# Altium PCB current_sensor_power_pcb.PcbDoc
Units mil, origin at the board's own origin, x right, y up, seen from the top; angles counter-clockwise.
Board outline 2354 x 1348.5 mil, 2 copper layers (Top Layer, Bottom Layer); 16 components, 8 nets, 48 pads, 14 vias.
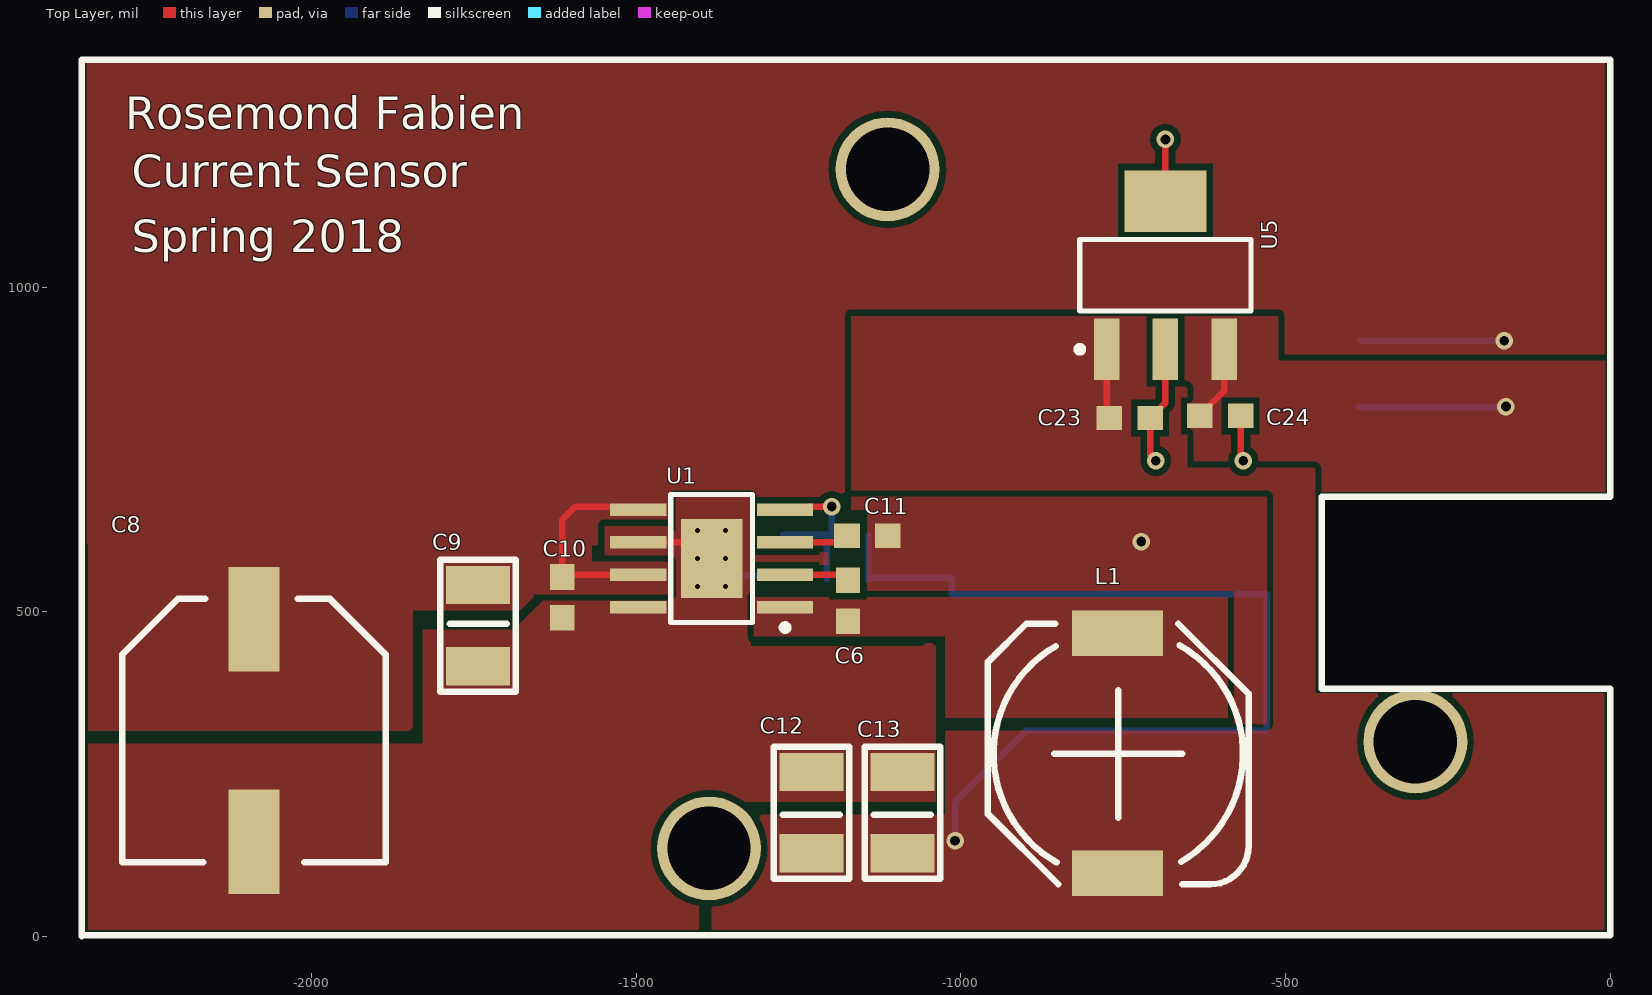
[diagram p0: Top Layer view]
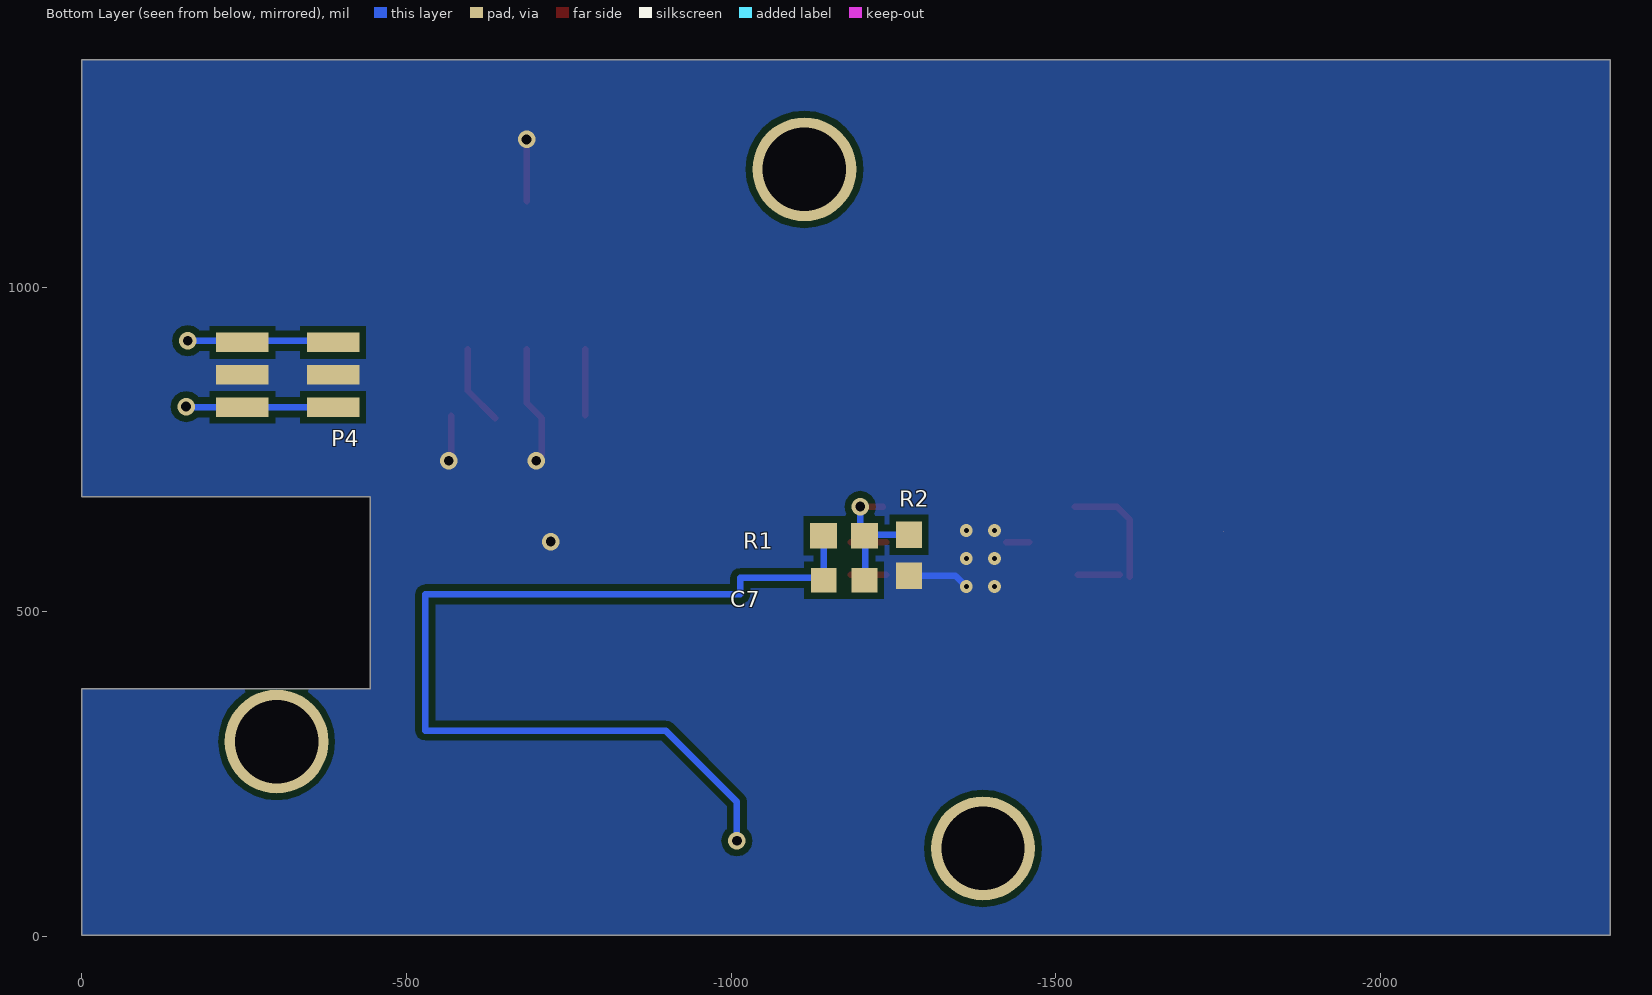
[diagram p1: Bottom Layer view, seen from below]

## Layer stack, top to bottom
Top Solder: solder mask 0.4, Solder Resist, Dk 3.5
Top Layer: signal copper 1.4
Dielectric 1: dielectric 12.6, FR-4, Dk 4.8
Bottom Layer: signal copper 1.4
Bottom Solder: solder mask 0.4, Solder Resist, Dk 3.5

## Board outline
-2354,1.5 -2354,1350 0,1350 0,677 -444,677 -444,381 0,381 0,1.5
cut-out: -1758.5,623.5

## Design rules (kind name [scope] priority, off if disabled: settings)
Clearance [All] p1: gap=10 ignorepadtopadclearanceinfootprint=FALSE except(0: Arc-Hole Track-Hole SMDPad-Hole THPad-Hole Via-Hole Fill-Hole Poly-Hole Region-Hole Text-Hole; 5: Track-Track Track-SMDPad SMDPad-SMDPad; 7: Track-Via)
HoleSize [All] p1: absolutevalues=TRUE maxlimit=150 minlimit=7 maxpercent=80.000 minpercent=20.000
MinimumAnnularRing [All] p1: minimumring=6
MinimumSolderMaskSliver [All] p1: minsoldermaskwidth=1
PolygonConnect [All] p1: connectstyle=Direct reliefconductorwidth=10 reliefentries=4 polygonreliefangle="90 Angle" airgapwidth=10
RoutingVias [All] p1: holewidth=10 width=22 viastyle="Through Hole" minholewidth=10 minwidth=22 maxholewidth=100 maxwidth=150
SilkToSolderMaskClearance [IsPad] p1: minsilkscreentomaskgap=5 clearancetoexposedcopper=TRUE
SolderMaskExpansion [All] p1: expansion=4
Width [All] p1: maxlimit=150 minlimit=8 preferedwidth=10
27 further rules are at their usual default settings.

## Components (designator, comment, footprint, x,y, rotation, side; value= is the part's Value field where it differs from the comment)
C6 "Cap" CAPC0603 -1174,517 r270 top value=470nF
C7 "Cap" CAPC0603 -1174,548.5 r180 bottom value=75pF
C8 "EEHZA1H101P" EEHZA1H101P -2089,317 r0 top value=100uF
C9 "Cap" CAP1210 -1744,542 r90 top value=10uF
C10 "Cap" CAPC0603 -1614,522 r270 top value=100nF
C11 "Cap" CAPC0603 -1144,617 r0 top value=10uF
C12 "Cap" CAP1210 -1230,127 r270 top value=47uF
C13 "Cap" CAP1210 -1090,127 r270 top value=47uF
C23 "Cap" CAPC0603 -740,798.33 r0 top value=1uF
C24 "Cap" CAPC0603 -600.55,801.65 r0 top value=50uF
L1 "MSS1048-563MLB" MSS1048-563MLB -759,282 r0 top value=56uH
P4 "Amphenol 20021121-00006C4LF" "Amphenol FCI 20021121-00006C4LF" -317,865 r180 bottom
R1 "Res" RES0603 -1174,617 r180 bottom value=40.2k
R2 "Res" RES0603 -1274,587 r270 bottom value=10k
U1 "LMR23610ADDAR" LMR23610ADDAR -1384,582 r180 top
U5 "3.3V LDO Reg" SOT23-4n -685,1018.33 r90 top

## Footprints (in the part's own frame and the unit in brackets; to place one, negate y for a bottom-side part, rotate by r counter-clockwise, add the part's x,y. Pads: shape width x height; smd on the part's side, far side on the other; paste and mask are expansions set on the pad)
"Amphenol FCI 20021121-00006C4LF" [mm] "6 Positions Header Connector"
  rect 2.05x0.76 smd: 1(-1.775,1.27) 2(-1.775,0) 3(-1.775,-1.27) 4(1.775,1.27) 5(1.775,0) 6(1.775,-1.27)
  body extent -2.75,-1.9 2.75,1.91, height 4.51
CAP1210 [mm]
  rect 1.5x2.5 smd: 1(-0.02,0) 2(-3.2,0)
  silkscreen extent -4.2,-1.48 0.97,1.48, body extent -3.22,-1.25 0,1.26, height 2.5
CAPC0603 [mm] "Chip Capacitor, 2-Leads, Body 1.60x0.80mm, IPC Medium Density"
  rect 1x0.95 smd: 1(-0.8,0) 2(0.8,0)
  body extent -0.88,-0.48 0.87,0.48, height 0.8
EEHZA1H101P [mm] "CAP ALUM POLY HYB 100UF 50V SMD"
  rect 2x4.1 smd: 1(0,4.35) 2(0,-4.35)
  silkscreen extent -5.15,-5.15 5.15,5.15, body extent -5.24,-5.99 5.25,5.99, height 10.54
LMR23610ADDAR [mm] "IC REG BUCK ADJ 1A SYNC 8SOPWRPD"
  rect 2.2x0.5 smd: 1(-2.875,1.905) 2(-2.875,0.635) 3(-2.875,-0.635) 4(-2.875,-1.905) 5(2.875,-1.905) 6(2.875,-0.635) 7(2.875,0.635) 8(2.875,1.905)
  rect 2.4x3.1 smd: 9(0,0)
  silkscreen extent -3,-2.5 1.6,2.83, body extent -2,-2.5 2,2.5, height 1.7
MSS1048-563MLB [mm] "FIXED IND 56UH 1.7A 126 MOHM"
  rect 3.56x1.78 smd: 1(0,4.7) 2(0,-4.7)
  silkscreen extent -5.06,-5.13 5.14,5.07, body extent -5.1,-5.15 5.1,5.15, height 5
RES0603 [mm] "Chip Resistor, 2-Leads, Body 1.60x0.80mm, IPC Medium Density"
  rect 1.05x1 smd: 1(-0.8,0) 2(0.8,0)
  body extent -0.88,-0.48 0.87,0.47, height 0.8
SOT23-4n [mm] "SOT223, 4-Leads, Body 6.50x7.00mm (avg), Pitch 2.30mm, IPC Medium Density"
  rect 2.4x1 smd: 1(-2.9,2.3) 2(-2.9,0) 3(-2.9,-2.3)
  rect 2.4x3.2 smd: 4(2.9,0)
  silkscreen extent -3.02,-3.35 1.4,3.47, body extent -1.85,-3.35 1.85,3.35, height 1.7

## Part data
C6: Supplier Part Number 1=399-7934-2-ND, Supplier 1=Digi-Key
C7: Supplier Part Number 1=399-15423-2-ND, Supplier 1=Digi-Key
C8: "CAP ALUM POLY HYB 100UF 50V SMD", Manufacturer 1=Panasonic, Supplier Part Number 1=P15442CT-ND, Tolerance=20%, Voltage=50V, ComponentLink1Description="Web Site", ComponentLink1URL=https://na.industrial.panasonic.com/products/capacitors/aluminum-electrolytic-capacitors/conductive-polymer-hybrid-aluminum-electrolytic/series/za-high-temp-reflow/ABA0135/model/EEHZA1H101P, ComponentLink2Description="Data Sheet", ComponentLink2URL=https://industrial.panasonic.com/cdbs/www-data/pdf/RDD0000/ABA0000C1221.pdf, ComponentLink3Description="ZA Series Technical Data", ComponentLink3URL=https://industrial.panasonic.com/cdbs/www-data/pdf/RDD0000/ABA0000COS44.pdf, Manufacturer Part Number 1=EEHZA1H101P, Supplier 1=Digi-Key
C9 C11: Supplier Part Number 1=399-15352-2-ND, Supplier 1=Digi-Key
C10: Supplier Part Number 1=399-7374-2-ND, Supplier 1=Digi-Key
C12 C13: Supplier Part Number 1=399-5516-2-ND, Supplier 1=Digi-Key
C23 C24: Manufacturer Part Number=C0603C105K8PACTU, Supplier Part Number 1=399-3118-1-ND, Supplier 1=Digi-Key
L1: "FIXED IND 56UH 1.7A 126 MOHM", Manufacturer 1=Coilcraft, ComponentLink1Description="Web Site", ComponentLink1URL=https://www.coilcraft.com/mss1048.cfm, Manufacturer Part Number 1=MSS1048-563MLB, Supplier 1=Coilcraft, Supplier Part Number 1=MSS1048-563MLB
P4: library part "Amphenol FCI 20021121-00006C4LF", "6 Positions Header Connector 0.050\" (1.27mm) Surface Mount Gold", Manufacturer 1="Amphenol FCI", Manufacturer Part Number 1=20021121-00006C4LF, Supplier Part Number 1=609-3693-1-ND, ComponentLink1Description=Website, Supplier 1=Digi-Key, System=Connector
R1: Supplier Part Number 1=RMCF0603FT40K2CT-ND, Supplier 1=Digi-Key
R2: Supplier Part Number 1=RMCF0603JT10K0CT-ND, Supplier 1=Digi-Key
U1: "IC REG BUCK ADJ 1A SYNC 8SOPWRPD", Manufacturer 1="Texas Instruments", Supplier Part Number 1=296-47267-1-ND, ComponentLink1Description=Datasheet, ComponentLink1URL=http://www.ti.com/lit/ds/symlink/lmr23610.pdf, ComponentLink2Description="Web Site", ComponentLink2URL=http://www.ti.com/product/LMR23610/description, Manufacturer Part Number 1=LMR23610ADDAR, Supplier 1=Digi-Key
U5: library part LM3940IMPX-3.3, "IC REG LDO 3.3V 1A SOT223", Supplier Part Number 1=LM3940IMPX-3.3/NOPBCT-ND, Supplier 1=Digi-Key

## Free pads (board coordinates)
  round 160 hole 128.5: 4(-1388,135.5) 4(-1113,1181.5) 4(-300,300)

## Via types
v1: diameter 27, hole 15, Top Layer to Bottom Layer, tented both sides, 8 vias
v2: diameter 19.68, hole 7.87, Top Layer to Bottom Layer, tented both sides, 6 vias

## Nets (pads, with @x,y where several pads share a name; then routed paths per layer and width w, separated by ;. In a path a pad name is that pad's centre, name@x,y a point inside that pad or via, vN(x,y) a via of type N, cw(c..) or ccw(c..) an arc to the next point about the centre after c; other vN are vias at no path point)
3V3: C24.1 P4.3 P4.6 U5.3 | length 348.6
  Top Layer w10: C24.1@-636.5,798.33 -594.45,840.37 U5.3
  Bottom Layer w10: P4.6 P4.3 v1@-161.5,815
  other v1: -160.5,816
5V: C7.1 C12.1 C13.1 C23.1 L1.2 R1.1 U5.1 | length 1605.8
  Top Layer w10: C23.1@-775.55,802.38 U5.1
  Bottom Layer w10: R1.1 C7.1 -1139,552 -1014,552 -1014,527 -529,527 -529,317 -899,317 -1009,207 v1(-1009,147)
24V: C8.1 C9.1 C10.1 P4.1 P4.4 U1.5 U1.7 | length 468.2
  Top Layer w10: C10.1 -1614,642 -1594,662 U1.5@-1529,662 ; C10.1@-1599,557 U1.7@-1534,557
  Bottom Layer w10: P4.4@-384.38,917.5 v1(-163,917.5)
GND: C8.2 C9.2 C10.2 C11.2 C12.2 C13.2 C23.2 C24.2 P4.2 P4.5 R2.2 U1.6 U1.8 U1.9 U5.2 U5.4 | length 463.3
  Top Layer w10: U1.6@-1459,607 U1.9@-1424,607 ; v1@-708.5,741 C23.2 -685,821.83 U5.2 ; U5.4 v1(-685,1227.5) ; v1@-569.06,736.56 C24.2
  Bottom Layer w10: v2(-1362.35,538.69) -1345.53,555.5 R2.2
  other v1: -722,608 -700,732.5 -565,732.5
  other v2: -1405.65,538.69 -1405.65,582 -1362.35,582 -1405.65,625.31 -1362.35,625.31
NetC6_1: C6.1 U1.2 | length 55
  Top Layer w10: U1.2@-1239,557 C6.1@-1184,557
NetC6_2: C6.2 L1.1 U1.1
NetC7_2: C7.2 R1.2 R2.1 U1.4 | length 215.5
  Top Layer w10: U1.4@-1234,662 v1(-1199,662)
  Bottom Layer w10: R2.1 -1206.99,618.5 C7.2@-1206.99,549.99 ; R1.2@-1199,617 v1(-1199,662)
NetC11_1: C11.1 U1.3 | length 55
  Top Layer w10: U1.3@-1239,607 C11.1@-1184,607

## Polygon pours and split planes (outlines as drawn)
5V on Top Layer "5V_L01_P052" (solid, pour order 52): -544,10 -9,10 -9,374.5 -544,374.5
24V on Top Layer "24V_L01_P074" (solid, pour order 74): -2344,602 -2346.5,604.5 -2346.5,1350 -8,1350 -8,886.5 -969.7,886.5 -1254.2,602
no net on Top Layer "NONET_L01_P072" (solid, pour order 72): -293,725
3V3 on Top Layer "3V3_L01_P070" (solid, pour order 70): -749.85,955.5 -511.5,955.5 -511.5,886.5 -8,886.5 -7.5,886 -7.5,685 -455,685 -455,720.5 -746.34,720.5
5V on Top Layer "5V_L01_P068" (solid, pour order 68): -1169,677 -1169,955.5 -733.5,955.5 -651.5,955.5 -651.5,721.5 -456,721.5 -454,719.5 -454,679.8
5V on Top Layer "5V_L01_P054" (solid, pour order 54): -544,340 -454,340 -454,690 -539,690
GND on Top Layer "GND_L01_P016" (solid, pour order 16): -1169,677 -1169,657 -1144,657 -1144,532 -579,532 -579,327 -529,327 -529,677
NetC6_2 on Top Layer "NETC6_2_L01_P014" (solid, remove dead copper, pour order 14): -589,337 -589,427 -589,522 -1319,522 -1319,512 -1319,502 -1319,462 -1214,462 -1024,462 -1024,337
5V on Top Layer "5V_L01_P012" (solid, remove dead copper, pour order 12): -1384,10 -1384,187 -1024,187 -1024,317 -544,317 -544,10
GND on Top Layer "GND_L01_P044" (solid, remove dead copper, pour order 44): -2344,10 -1404,10 -1404,212 -1399,207 -1039,207 -1039,447 -1049,457 -1059,447 -1324,447 -1324,527.15 -1199,527.31 -1199,547 -1219,547 -1224,542 -1234,542 -1239,537 -1323.84,537 -1324,576.84 -1224,577 -1219,572 -1204,572 -1204,597 -1219,597 -1224,592 -1224,587 -1323.84,587 -1324,677 -1439,677 -1439,622 -1449,632 -1549,632 -1549,587 -1444,587 -1444,527 -1554,527 -1564,517 -1644,517 -1689,472 -1829,472 -1829,297 -2344,297
24V on Top Layer "24V_L01_P020" (solid, remove dead copper, pour order 20): -1644,577 -1449,577 -1449,527 -1644,527 -1644,552
24V on Top Layer "24V_L01_P018" (solid, pour order 18): -2344,317 -1849,317 -1844,322 -1844,502 -1679,502 -1659,522 -1659,527 -1579,527 -1569,537 -1449,537 -1449,572 -1444,577 -1569,577 -1569,602 -2344,602
no net on Top Layer "NONET_L01_P042" (solid, pour order 42): -1324,532
no net on Top Layer "NONET_L01_P038" (solid, pour order 38): -1324,537.16
GND on Bottom Layer "GND_L02_P078" (solid, pour order 78): -2354.5,1350 -2354,1349.5 -2354,1.5 0,1.5 0,381 -444,381 -444,677 0,677 0,1350
GND on Bottom Layer "GND_L02_P076" (solid, pour order 76): -2347.01,1350 -8,1350 -8,683.5 -450,683.5 -450,374 -11.5,374 -8,370.5 -8,8 -2347.5,8

## Other copper
Top Layer:
  pour cut-out: -1449,537

## Silkscreen, mask and mechanical layers (free items; w line width, h text height)
Top Overlay:
  lines w0: -2354,0 -2352,2
  lines w10: -2354,0 -2354,1350 0,1350 0,677 -444,677 -444,381 0,381 0,2 -1580,2 -2352,2
  text "Rosemond Fabien" at -2287.5,1243.46 h50
  text "Current Sensor" at -2277.5,1153.48 h50
  text "Spring 2018" at -2277.5,1053.5 h50
Board Outline:
  the board outline again, w10